# EAGLE board AtxPowerDispatcher3 (EAGLE 6.1)
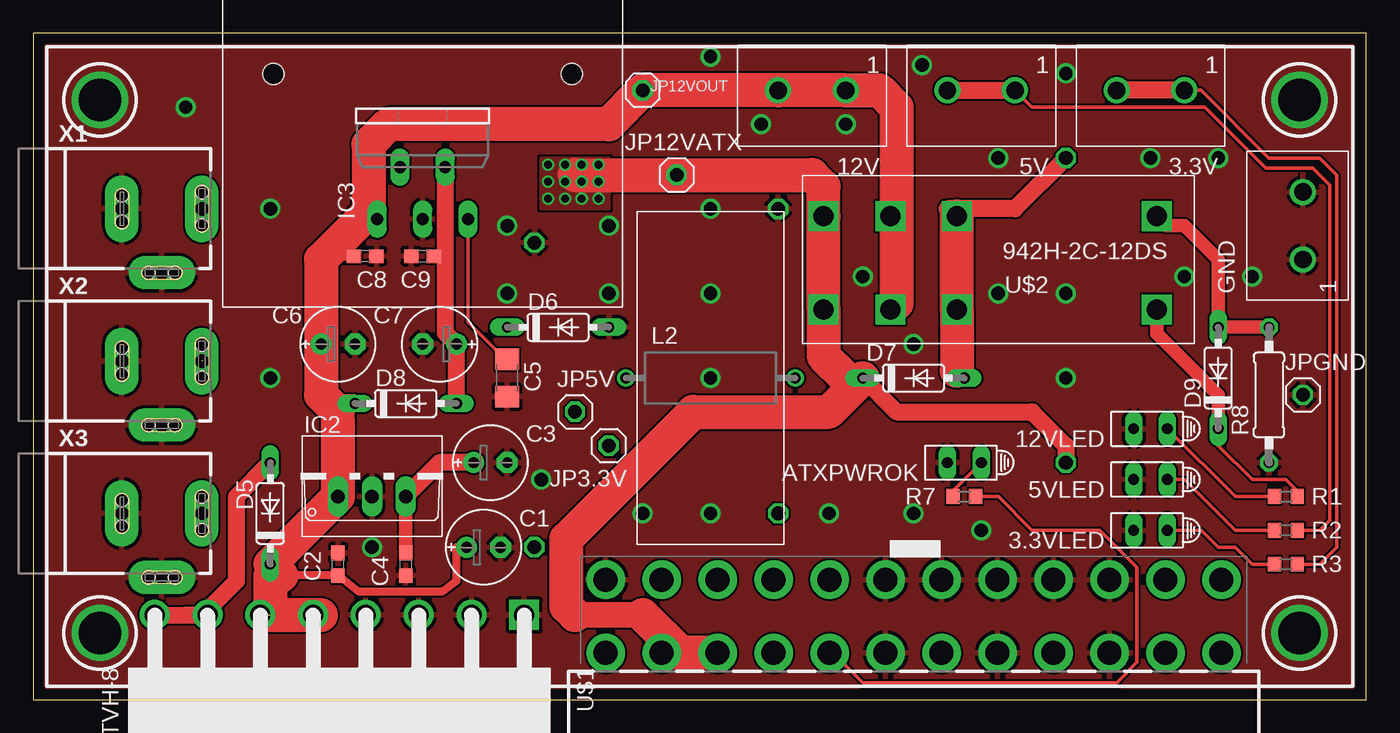
[diagram p0: board, top side]
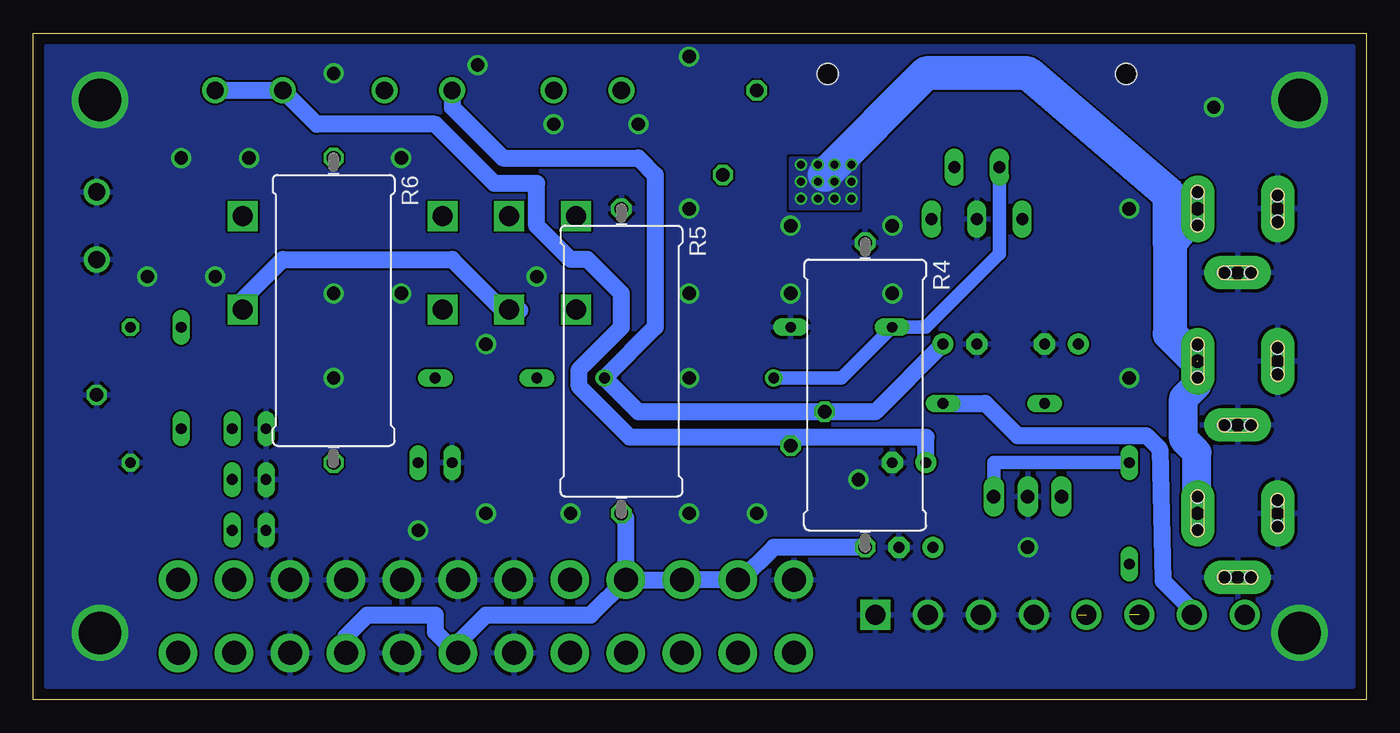
[diagram p1: board, bottom side, seen from below]

Size 100 x 50 mm. Coordinates in mm from the lower left corner, seen from the top.
Outline: 0,0 100,0 100,50 0,50 0,0
Copper layers (1*16): Top 0.035mm / dielectric 1.5mm / Bottom 0.035mm
Design rules: minimum track width 6mil, minimum drill 12mil, track to track 6mil, track to pad 6mil, pad to pad 6mil, via to via 6mil, smd to smd 0mil, copper to edge 0mil, drill to drill 10mil, minimum pad ring 10mil, minimum via ring 6mil, stop-mask expansion 2mil, vias tented up to drill 100mil, thermal gap 10mil

## Footprints (pad centres in the part's own frame; a part is rotated, then mirrored left to right if it is on the bottom)
1X02_BIG = drill 1.3: P$1 0,0; P$2 5.08,0
HLMP6 = drill 0.813 long: A -1.27,0; K 1.27,0
E2,5-6E = drill 0.813 pad 1.575: + -1.27,0 | drill 0.813 pad 1.575 octagon: - 1.27,0
C0603 = smd 1.1 x 1: 1 -0.85,0; 2 0.85,0
C1206 = smd 1.6 x 1.8: 1 -1.4,0; 2 1.4,0
DO35-7 = drill 0.813 long: A 3.81,0; C -3.81,0
TO220V = drill 1.016 long: 1 -2.54,-2.54; 2 0,-2.54; 3 2.54,-2.54
TO220-5 = drill 0.9 long: 1 -3.4,-8.4; 2 -1.7,-4.5; 3 0,-8.4; 4 1.7,-4.5; 5 3.4,-8.4 | hole 1.6: -11.2,2.5; 11.2,2.5
ATX24_RIGHT_ANGLE = drill 1.8 pad 2.9: 1 23.1,4.76; 2 18.9,4.76; 3 14.7,4.76; 4 10.5,4.76; 5 6.3,4.76; 6 2.1,4.76; 7 -2.1,4.76; 8 -6.3,4.76; 9 -10.5,4.76; 10 -14.7,4.76; 11 -18.9,4.76; 12 -23.1,4.76; 13 23.1,10.26; 14 18.9,10.26; 15 14.7,10.26; 16 10.5,10.26; 17 6.3,10.26; 18 2.1,10.26; 19 -2.1,10.26; 20 -6.3,10.26; 21 -10.5,10.26; 22 -14.7,10.26; 23 -18.9,10.26; 24 -23.1,10.26
1X01 = drill 1.016 octagon: 1 0,0
2200-12.7 = drill 0.8 pad 1.27: 1 -6.35,0; 2 6.35,0
R0603 = smd 1 x 1.1: 1 -0.85,0; 2 0.85,0
0922/22 = drill 1.016 octagon: 1 -11.43,0; 2 11.43,0
0207/10 = drill 0.813 octagon: 1 -5.08,0; 2 5.08,0
VH_8 = drill 1.5 square: 1 0,0 | drill 1.5: 2 3.96,0; 3 7.92,0; 4 11.88,0; 5 15.84,0; 6 19.8,0; 7 23.76,0; 8 27.72,0
942H = drill 1.5 square: 1 -11.9,3.75; 2 3.1,3.75; 3 8.1,3.75; 4 13.1,3.75; '1 -11.9,-3.25; '2 3.1,-3.25; '3 8.1,-3.25; '4 13.1,-3.25
2DC-0005D100--H3 = drill 1 pad 2.5 long: 1 3.75,0; 2 -2.25,0; 3 0.75,-4.8 | hole 1: -2.25,1; -2.25,-1; 3.75,1.25; 3.75,-1.25; 1.75,-4.8; -0.25,-4.8

## Placement (x,y rotation side)
3.3V  [1X02_BIG]  86.36,45.72 180 top
3.3VLED  HLMP6  [HLMP6]  83.82,12.7 180 top
5V  [1X02_BIG]  73.66,45.72 180 top
5VLED  HLMP6  [HLMP6]  83.82,16.51 180 top
12V  [1X02_BIG]  60.96,45.72 180 top
12VLED  HLMP6  [HLMP6]  83.82,20.32 180 top
ATXPWROK  HLMP6  [HLMP6]  69.85,17.78 180 top
C1  33u  [E2,5-6E]  33.78,11.43 0 top
C2  0.1u  [C0603]  22.86,10.16 90 top
C3  100u  [E2,5-6E]  34.29,17.78 0 top
C4  0.1u  [C0603]  27.94,10.16 270 top
C5  10u  [C1206]  35.56,24.13 270 top
C6  1000uF low-ESR  [E2,5-6E]  22.86,26.67 0 top
C7  1000uF low-ESR  [E2,5-6E]  30.48,26.67 180 top
C8  0.1u  [C0603]  24.89,33.27 0 top
C9  0.1u  [C0603]  29.21,33.27 180 top
D5  1N4148DO35-7  [DO35-7]  17.78,13.97 90 top
D6  1N4148DO35-7  [DO35-7]  39.37,27.94 0 top
D7  1N4148DO35-7  [DO35-7]  66.04,24.13 0 top
D8  1N4148DO35-7  [DO35-7]  27.94,22.23 0 top
D9  1N4148DO35-7  [DO35-7]  88.9,24.13 90 top
GND  [1X02_BIG]  95.25,33.02 90 top
IC2  788TV  [TO220V]  25.4,17.78 0 top
IC3  SI-8050  [TO220-5]  29.21,44.45 0 top
J2  ATX24RH  [ATX24_RIGHT_ANGLE]  66.04,-1.27 0 top
JP3.3V  [1X01]  43.18,19.05 180 top
JP5V  [1X01]  40.64,21.59 0 top
JP12VATX  [1X01]  48.26,39.37 0 top
JP12VOUT  [1X01]  45.72,45.72 180 top
JPGND  [1X01]  95.25,22.86 0 top
L2  47uH  [2200-12.7]  50.8,24.13 0 top
R1  1k  [R0603]  93.98,15.24 0 top
R2  1k  [R0603]  93.98,12.7 0 top
R3  1k  [R0603]  93.98,10.16 0 top
R4  5 5W  [0922/22]  37.59,22.86 270 bottom
R5  5 5W  [0922/22]  55.88,25.4 270 bottom
R6  30 5W  [0922/22]  77.47,29.21 270 bottom
R7  1k  [R0603]  69.85,15.24 0 top
R8  90ohm 1/4W  [0207/10]  92.71,22.86 90 top
U$1  TUS_POWER_SOCKETVH-8  [VH_8]  36.83,6.35 180 top
U$2  942H-2C-12DS  [942H]  72.39,33.02 180 top
X1  DCJACK--H3  [2DC-0005D100--H3]  8.89,36.83 0 top
X2  DCJACK--H3  [2DC-0005D100--H3]  8.89,25.4 0 top
X3  DCJACK--H3  [2DC-0005D100--H3]  8.89,13.97 0 top

## Library data of the parts
3.3V 5V 12V GND IC2 IC3 L2 U$1 U$2 = myparts
3.3VLED 5VLED 12VLED ATXPWROK = display-hp; MF: AGILENT TECHNOLOGIES; MPN: HLMP-6500; OC_FARNELL: 1652490; OC_NEWARK: 40K0088
C1-C9 R1-R3 R7 = rcl
D5-D9 = diode
J2 = SparkFun
JP3.3V JP5V JP12VATX JP12VOUT JPGND = pinhead
R4-R6 R8 = resistor
X1-X3 = kamiki-dcjack

## Nets
3.3V: 3.3V.P$1 3.3V.P$2 C3.+ C4.1 D5.A IC2.3 JP3.3V.1 R3.2 U$1.8
+5V: 5V.P$1 5V.P$2 C7.+ C9.1 D8.A IC3.4 JP5V.1 L2.2 R2.2 U$1.7
+12V: 12V.P$1 12V.P$2 C1.+ C2.1 C6.+ C8.1 D5.C D8.C D9.C IC2.1 IC3.1 JP12VOUT.1 R1.2 U$1.5 U$1.6 U$2.1 U$2.3 U$2.'3
GND: 3.3VLED.K 5VLED.K 12VLED.K ATXPWROK.K C1.- C2.2 C3.- C4.2 C5.2 C6.- C7.- C8.2 C9.2 D6.A GND.P$1 GND.P$2 IC2.2 IC3.3 J2.3 J2.5 J2.7 J2.15 J2.16 J2.17 J2.18 J2.19 J2.24 JPGND.1 R4.1 R5.1 R8.1 U$1.1 U$1.2 U$1.3 U$1.4 X1.2 X1.3 X2.2 X2.3 X3.2 X3.3
N$1: 12VLED.A R1.1
N$2: J2.8 R7.2
N$3: J2.4 J2.6 J2.21 J2.22 J2.23 R4.2 R5.2
N$4: 5VLED.A R2.1
N$5: 3.3VLED.A R3.1
N$6: ATXPWROK.A R7.1
N$8: D9.A R8.2 U$2.'1
N$9: D6.C IC3.2 L2.1
N$10: D7.A R6.1 U$2.2 U$2.'2
N$11: D7.C J2.10 J2.11 JP12VATX.1 R6.2 U$2.4 U$2.'4 X1.1 X2.1 X3.1
N$17: C5.1 IC3.5

## Tracks (layer width: path | path; a pad name or v marks a point on that pad's centre or on a via)
3.3V
  Top 0.152: 27.94,11.43 C4.1
  Top 0.254: R3.2 96.52,10.16 97.79,11.43 97.79,39.37 96.52,40.64 92.71,40.64 87.63,45.72 3.3V.P$1
  Top 1.016: IC2.3 27.94,11.43
  Top 1.27: 3.3V.P$1 3.3V.P$2 | C3.+ 30.48,17.78 IC2.3 | U$1.8 9.11,6.32 11.43,6.35 12.7,6.35 15.24,8.89 15.24,15.24 D5.A
  Bottom 1.016: D5.A 27.94,17.78 IC2.3
  Bottom 1.27: C3.+ 33.02,19.68 43.18,19.68 | 43.18,19.68 55.24,19.68 59.05,23.5 59.05,24.77 55.88,27.94 55.88,30.48 58.42,33.02 59.69,33.02 62.23,35.56 62.23,38.73 65.41,38.73 69.85,43.18 78.74,43.18 3.3V.P$2 3.3V.P$1 | JP3.3V.1 43.18,19.68
+5V
  Top 0.152: C9.1 30.48,33.02 30.91,33.02
  Top 0.254: 5V.P$1 74.93,44.45 87.88,44.45 92.46,39.88 96.01,39.88 97.28,38.61 97.28,13.46 96.52,12.7 R2.2
  Top 1.27: 5V.P$2 5V.P$1 | IC3.4 30.91,33.02 30.91,27.51 C7.+ D8.A
  Bottom 0.152: 12.7,6.35 U$1.7
  Bottom 1.27: 5V.P$2 68.58,44.45 64.77,40.64 54.61,40.64 53.34,39.37 53.34,27.94 L2.2 54.61,21.59 JP5V.1 36.83,21.59 C7.+ | D8.A 28.57,22.23 26.16,19.81 16.51,19.81 15.49,18.8 15.24,8.89 12.7,6.35
+12V  (2 unrouted)
  Top 0.152: D8.C 24.13,22.86 22.86,22.86 22.23,22.23 | 22.86,21.59 22.86,20.95 | 22.23,33.66 22.86,33.02 24.13,33.02 C8.1
  Top 0.254: R1.2 94.83,15.66 93.98,16.51 91.44,16.51 88.9,19.05 D9.C
  Top 0.61: D5.C 18.63,9.31 C2.1 23.11,9.14 24.38,8.13 30.73,8.13 31.75,8.89 31.75,11.43 C1.+
  Top 1.016: U$2.1 84.29,27.47 88.9,22.86 D9.C
  Top 1.27: 24.62,36.05 IC3.1 25.15,36.21 | 64.77,36.75 U$2.'3 | 64.77,29.75 U$2.3
  Top 2.54: D5.C IC2.1 22.86,20.95 | 24.62,36.05 22.23,33.66 21.59,33.02 C6.+ 21.59,22.86 22.23,22.23 22.86,21.59 | 25.15,36.21 25.15,41.66 26.67,43.18 43.18,43.18 JP12VOUT.1 12V.P$2 12V.P$1 63.5,45.72 64.77,44.45 64.77,36.75 64.77,29.75 | 18.63,9.31 17.78,9.31 17.78,6.35 21.59,6.35
  Bottom 0.152: 64.77,29.21 U$2.3
  Bottom 1.27: U$2.1 84.29,30.01 81.28,33.02 68.58,33.02 64.77,29.21 63.5,29.21
GND  (via drill 1, 3.2)
  other vias: 5,45 5,5 95,45 95,5 11.43,44.45 17.78,36.83 77.47,46.99 60.96,43.18 50.8,48.26 77.47,30.48 77.47,24.13 71.12,12.7 72.39,30.48 72.39,40.64 66.04,13.97 66.04,26.67 62.23,31.75 66.67,47.62 59.69,13.97 50.8,13.97 50.8,24.13 50.8,30.48 50.8,36.83 54.61,43.18 45.72,13.97 38.1,16.51 35.56,30.48 35.56,35.56 17.78,24.13 25.4,11.43 83.82,40.64 88.9,40.64 86.36,31.75 91.44,31.75 43.18,35.56 43.18,30.48
  pour Bottom (rank 3): 1,49 1,1 99,1 99,49
  pour Top (rank 3): 1,49 1,1 99,1 99,49
N$1
  Top 0.254: R1.1 90.17,15.24 12VLED.A
N$2
  Top 0.152: 71.12,15.24 R7.2
  Top 0.254: J2.8 60.01,3.49 62.23,1.27 81.28,1.27 82.8,2.79 82.8,9.91 80.01,12.7 74.93,12.7 72.39,15.24 71.12,15.24
N$3
  Bottom 0.152: 46.99,8.89 J2.23
  Bottom 1.27: J2.4 76.54,4.74 74.93,6.35 69.85,6.35 69.85,5.08 68.26,3.49 J2.6 68.14,4.25 66.04,6.35 58.18,6.35 J2.21 | J2.21 J2.22 J2.23 | R4.2 44.45,11.43 46.99,8.89 | J2.21 55.54,13.63 R5.2
N$4
  Top 0.254: R2.1 90.17,12.7 86.36,16.51 5VLED.A
N$5
  Top 0.254: 3.3VLED.A 87.63,12.7 88.9,11.43 90.17,11.43 91.44,10.16 R3.1
N$6
  Top 0.254: R7.1 69,15.66 ATXPWROK.A
N$8
  Top 1.016: R8.2 D9.A 88.9,33.02 86.36,35.56 85,35.56 U$2.'1
N$9
  Bottom 1.016: IC3.2 27.51,33.45 33.02,27.94 D6.C 39.37,24.13 L2.1
N$10
  Top 1.27: 69.29,24.69 D7.A | R6.1 73.66,36.83 68.58,36.83 69.14,36.27 | 69.14,36.27 69.85,35.56 | U$2.'2 69.14,36.27
  Top 2.54: U$2.'2 U$2.2 69.29,24.69
N$11  (via drill 0.6)  (1 unrouted)
  Top 0.152: 11.43,36.83 X1.1 v12.7,36.83
  Top 1.27: R6.2 77.47,19.05 74.93,21.59 64.77,21.59 D7.C 60.96,24.13
  Top 1.93: 45.72,6.35 40.64,6.35
  Top 2.54: J2.11 J2.10 48.58,3.49 45.72,6.35 | 40.64,6.35 40.01,6.99 40.01,12.06 49.53,21.59 59.69,21.59 D7.C | 40.64,39.37 JP12VATX.1 58.42,39.37 59.29,38.5 U$2.'4 U$2.4 59.29,25.8 60.96,24.13
  Bottom 0.152: 13.97,25.4 13.34,26.04
  Bottom 2.184: X3.1 12.7,13.97 12.7,18.54 13.72,19.56 13.72,22.61 12.7,23.62 12.7,25.4
  Bottom 2.54: v12.7,36.83 14.73,34.29 | 14.73,34.29 14.73,27.43 13.34,26.04 12.7,25.4 | 14.73,34.29 14.73,37.85 25.4,46.99 33.02,46.99 40.64,39.37
  other vias: 38.61,40.13 39.88,40.13 41.15,40.13 41.15,40.13 42.42,40.13 38.61,40.13 38.61,38.86 39.88,38.86 41.15,38.86 42.42,38.86 42.42,37.59 41.15,37.59 39.88,37.59 38.61,37.59
  pour Top: 38.1,40.64 38.1,36.83 43.18,36.83 43.18,40.64
  pour Bottom: 38.1,40.64 38.1,36.83 43.18,36.83 43.18,40.64
N$17
  Top 0.152: 35.56,25.4 C5.1
  Top 0.254: IC3.5 32.61,28.35 35.56,25.4